# EAGLE board carte suiveur (EAGLE 5.12)
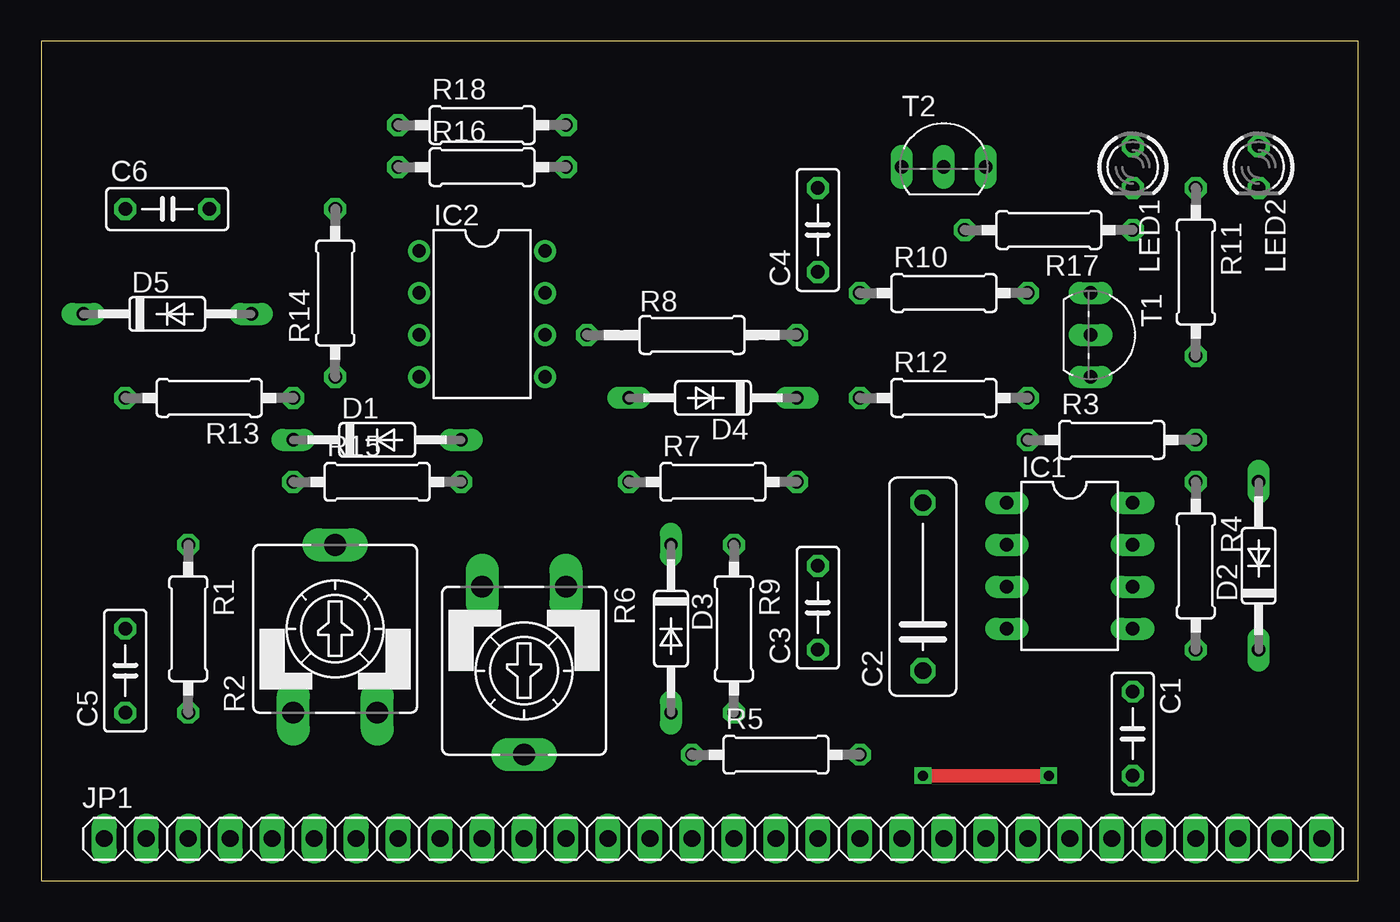
[diagram p0: board, top side]
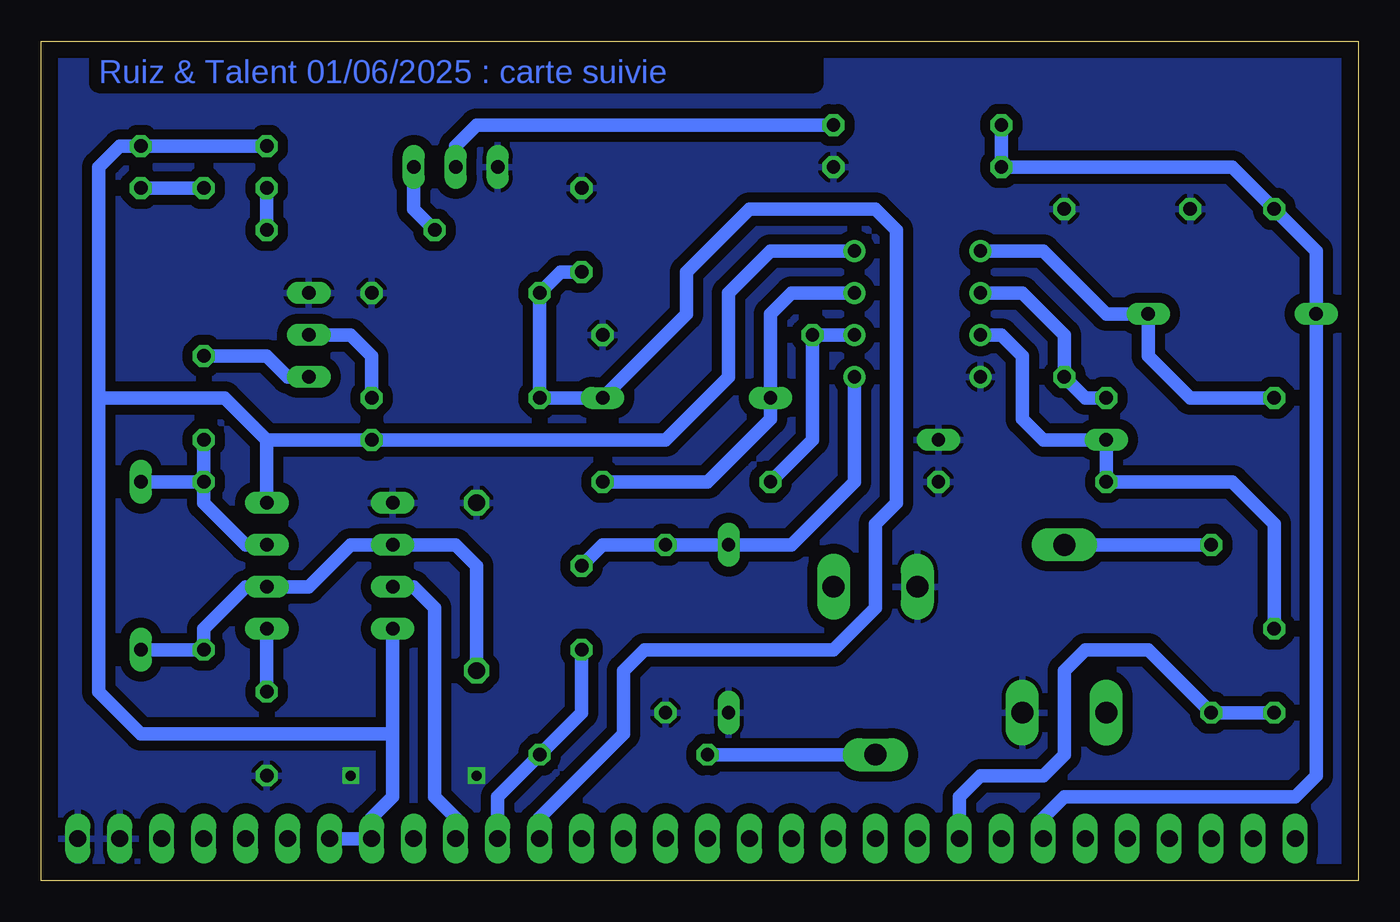
[diagram p1: board, bottom side, seen from below]

Size 79.68 x 50.79 mm. Coordinates in mm from the lower left corner, seen from the top.
Outline: 0,0 79.68,0 79.68,50.79 0,50.79 0,0
Copper layers (1*16): Top 0.035mm / dielectric 1.5mm / Bottom 0.035mm
Design rules "default *": minimum track width 10mil, minimum drill 24mil, track to track 8mil, track to pad 8mil, pad to pad 8mil, via to via 8mil, smd to smd 8mil, copper to edge 40mil, drill to drill 8mil, minimum pad ring 10mil, minimum via ring 8mil, stop-mask expansion 4mil, vias tented up to drill 0mil, thermal gap 10mil

## Footprints (pad centres in the part's own frame; a part is rotated, then mirrored left to right if it is on the bottom)
C050-025X075 = drill 0.813 octagon: 1 -2.54,0; 2 2.54,0
C102-043X133 = drill 1.016 octagon: 1 -5.08,0; 2 5.08,0
DO35-10 = drill 0.813 long: A 5.08,0; C -5.08,0
DIL-08 = drill 0.813 long: 1 -3.81,-3.81; 2 -1.27,-3.81; 3 1.27,-3.81; 4 3.81,-3.81; 5 3.81,3.81; 6 1.27,3.81; 7 -1.27,3.81; 8 -3.81,3.81
DIL08 = drill 0.813 pad 1.27 round: 1 -3.81,-3.81; 2 -1.27,-3.81; 3 1.27,-3.81; 4 3.81,-3.81; 5 3.81,3.81; 6 1.27,3.81; 7 -1.27,3.81; 8 -3.81,3.81
1X30 = drill 1.016 long: 1 -36.83,0; 2 -34.29,0; 3 -31.75,0; 4 -29.21,0; 5 -26.67,0; 6 -24.13,0; 7 -21.59,0; 8 -19.05,0; 9 -16.51,0; 10 -13.97,0; 11 -11.43,0; 12 -8.89,0; 13 -6.35,0; 14 -3.81,0; 15 -1.27,0; 16 1.27,0; 17 3.81,0; 18 6.35,0; 19 8.89,0; 20 11.43,0; 21 13.97,0; 22 16.51,0; 23 19.05,0; 24 21.59,0; 25 24.13,0; 26 26.67,0; 27 29.21,0; 28 31.75,0; 29 34.29,0; 30 36.83,0
LED3MM = drill 0.813 octagon: A -1.27,0; K 1.27,0
0207/10 = drill 0.813 octagon: 1 -5.08,0; 2 5.08,0
CA9V = drill 1.321 long: A -2.54,-5.08; E 2.54,-5.08; S 0,5.08
0207/12 = drill 0.813 octagon: 1 -6.35,0; 2 6.35,0
TO92-EBC = drill 0.813 long: B 0,-1.27; C 2.54,-1.27; E -2.54,-1.27

## Placement (x,y rotation side)
C1  10n  [C050-025X075]  66.04,8.89 270 top
C2  1n  [C102-043X133]  53.34,17.78 90 top
C3  100n  [C050-025X075]  46.99,16.51 90 top
C4  100n  [C050-025X075]  46.99,39.37 90 top
C5  100n  [C050-025X075]  5.08,12.7 90 top
C6  100n  [C050-025X075]  7.62,40.64 0 top
D1  1N4148DO35-10  [DO35-10]  20.32,26.67 0 top
D2  1N4148DO35-10  [DO35-10]  73.66,19.05 90 top
D3  1N4148DO35-10  [DO35-10]  38.1,15.24 270 top
D4  1N4148DO35-10  [DO35-10]  40.64,29.21 180 top
D5  1N4148DO35-10  [DO35-10]  7.62,34.29 0 top
IC1  NE555  [DIL-08]  62.23,19.05 270 top
IC2  LM358N  [DIL08]  26.67,34.29 270 top
JP1  [1X30]  40.64,2.54 0 top
LED1  [LED3MM]  66.04,43.18 270 top
LED2  [LED3MM]  73.66,43.18 270 top
R1  4.7k  [0207/10]  8.89,15.24 270 top
R2  100k  [CA9V]  17.78,15.24 0 top
R3  33k  [0207/10]  64.77,26.67 0 top
R4  33k  [0207/10]  69.85,19.05 270 top
R5  4.7k  [0207/10]  44.45,7.62 0 top
R6  100k  [CA9V]  29.21,12.7 180 top
R7  5.6k  [0207/10]  40.64,24.13 0 top
R8  390  [0207/12]  39.37,33.02 0 top
R9  6.8k  [0207/10]  41.91,15.24 270 top
R10  57k  [0207/10]  54.61,35.56 0 top
R11  330  [0207/10]  69.85,36.83 270 top
R12  22k  [0207/10]  54.61,29.21 0 top
R13  5.6k  [0207/10]  10.16,29.21 180 top
R14  390  [0207/10]  17.78,35.56 90 top
R15  6.8k  [0207/10]  20.32,24.13 0 top
R16  57k  [0207/10]  26.67,43.18 0 top
R17  330  [0207/10]  60.96,39.37 180 top
R18  22k  [0207/10]  26.67,45.72 0 top
T1  [TO92-EBC]  64.77,33.02 270 top
T2  [TO92-EBC]  54.61,44.45 0 top

## Library data of the parts
C1-C6 R1 R3-R5 R7-R18 = resistor
D1-D5 = diode
IC1 = st-microelectronics; MF: Arrow Electronics; MPN: NE555N; OC_FARNELL: 1467742; OC_NEWARK: 89K1486
IC2 = linear
JP1 = pinhead
LED1 LED2 = led
R2 R6 = pot
T1 T2 = transistor-neu-to92

## Nets
GND: C1.2 C2.2 C4.2 C6.2 D1.A D3.A IC1.1 IC2.4 JP1.29 JP1.30 R2.E R6.E R8.2 R9.2 R10.2 R14.2 R15.2 R16.2 T1.E T2.E
N$1: LED1.K R17.1
N$2: D2.A IC1.7 R3.2 R4.1
N$3: C2.1 D2.C IC1.2 IC1.6 R4.2
N$4: C1.1 IC1.5
N$5: C5.2 D1.C IC2.3 R15.1
N$6: IC2.2 R13.1 R14.1
N$7: C3.2 D3.C IC2.5 R9.1
N$8: IC2.6 R7.1 R8.1
N$9: D4.A IC2.7 R7.2
N$10: R5.1 R6.S
N$12: D5.A IC2.1 R13.2
N$13: R1.1 R2.S
N$14: R11.2 T1.C
N$16: R17.2 T2.C
N$17: LED2.K R11.1
N$18: R18.2 T2.B
N$19: R12.2 T1.B
RETOUR_OEUIL_D: C5.1 JP1.9 R1.2
RETOUR_OEUIL_G: C3.1 JP1.20 R5.2
SIG_CARRE: IC1.3 JP1.21
SUIVI_D: C6.1 D5.C JP1.7 R16.1 R18.1
SUIVI_G: C4.1 D4.C JP1.19 R10.1 R12.1
VCC: IC1.4 IC1.8 IC2.8 JP1.23 JP1.24 LED1.A LED2.A R3.1

## Tracks (layer width: path | path; a pad name or v marks a point on that pad's centre or on a via)
GND  (via drill 0.6)
  Top 0.813: v53.34,6.35 v60.96,6.35
  pour Bottom (isolate 0.61): 0,0 80.01,0 80.01,50.8 0,50.8
N$1
  Bottom 0.813: R17.1 LED1.K
N$2
  Bottom 0.813: D2.A R4.1 R3.2 69.85,22.86 67.31,20.32 IC1.7
N$3
  Bottom 0.813: D2.C R4.2 69.85,15.24 67.31,17.78 IC1.6 63.5,17.78 60.96,20.32 IC1.2 54.61,20.32 53.34,19.05 C2.1
N$4
  Bottom 0.813: C1.1 IC1.5
N$5
  Bottom 0.813: C5.2 5.08,21.59 7.62,24.13 R15.1 D1.C 19.05,26.67 20.32,27.94 20.32,31.75 21.59,33.02 IC2.3
N$6
  Bottom 0.813: R13.1 16.51,29.21 R14.1 17.78,33.02 20.32,35.56 IC2.2
N$7
  Bottom 0.813: IC2.5 30.48,24.13 34.29,20.32 D3.C R9.1 45.72,20.32 C3.2
N$8
  Bottom 0.813: R7.1 33.02,26.67 R8.1 IC2.6
N$9
  Bottom 0.813: IC2.7 34.29,35.56 35.56,34.29 D4.A 35.56,27.94 39.37,24.13 R7.2
N$10
  Bottom 0.813: R6.S R5.1
N$12
  Bottom 0.813: R13.2 10.16,29.21 12.7,31.75 D5.A 15.24,34.29 19.05,38.1 IC2.1
N$13
  Bottom 0.813: R1.1 R2.S
N$14
  Bottom 0.813: R11.2 66.04,31.75 64.77,30.48 T1.C
N$16
  Bottom 0.813: T2.C 57.15,40.64 R17.2
N$17
  Bottom 0.813: R11.1 LED2.K
N$18
  Bottom 0.813: R18.2 53.34,45.72 54.61,44.45 T2.B
N$19
  Bottom 0.813: T1.B 60.96,33.02 59.69,31.75 R12.2
RETOUR_OEUIL_D
  Bottom 0.813: C5.1 R1.2 12.7,13.97 16.51,13.97 17.78,12.7 17.78,7.62 19.05,6.35 22.86,6.35 24.13,5.08 JP1.9
RETOUR_OEUIL_G
  Bottom 0.813: C3.1 46.99,10.16 R5.2 52.07,5.08 JP1.20
SIG_CARRE
  Bottom 0.813: JP1.21 54.61,3.81 55.88,5.08 55.88,16.51 57.15,17.78 IC1.3
SUIVI_D
  Bottom 0.813: JP1.7 19.05,3.81 17.78,5.08 3.81,5.08 2.54,6.35 D5.C 2.54,38.1 C6.1 7.62,43.18 R16.1 R18.1
SUIVI_G
  Bottom 0.813: C4.1 48.26,36.83 R10.1 R12.1 D4.C 40.64,34.29 40.64,36.83 36.83,40.64 29.21,40.64 27.94,39.37 27.94,22.86 29.21,21.59 29.21,16.51 31.75,13.97 43.18,13.97 44.45,12.7 44.45,8.89 49.53,3.81 JP1.19
VCC
  Bottom 0.813: JP1.24 JP1.23 59.69,3.81 58.42,5.08 58.42,8.89 | 58.42,8.89 IC1.4 | IC2.8 35.56,38.1 38.1,35.56 38.1,30.48 41.91,26.67 R3.1 66.04,26.67 | LED1.A LED2.A 74.93,44.45 76.2,43.18 76.2,29.21 | 76.2,29.21 76.2,11.43 73.66,8.89 58.42,8.89 | 66.04,26.67 68.58,29.21 76.2,29.21 | 66.04,26.67 IC1.8

## Text on the board
Bottom: Ruiz & Talent 01/06/2025 : carte suivie